# EAGLE board prog_adapter (EAGLE 6.4)
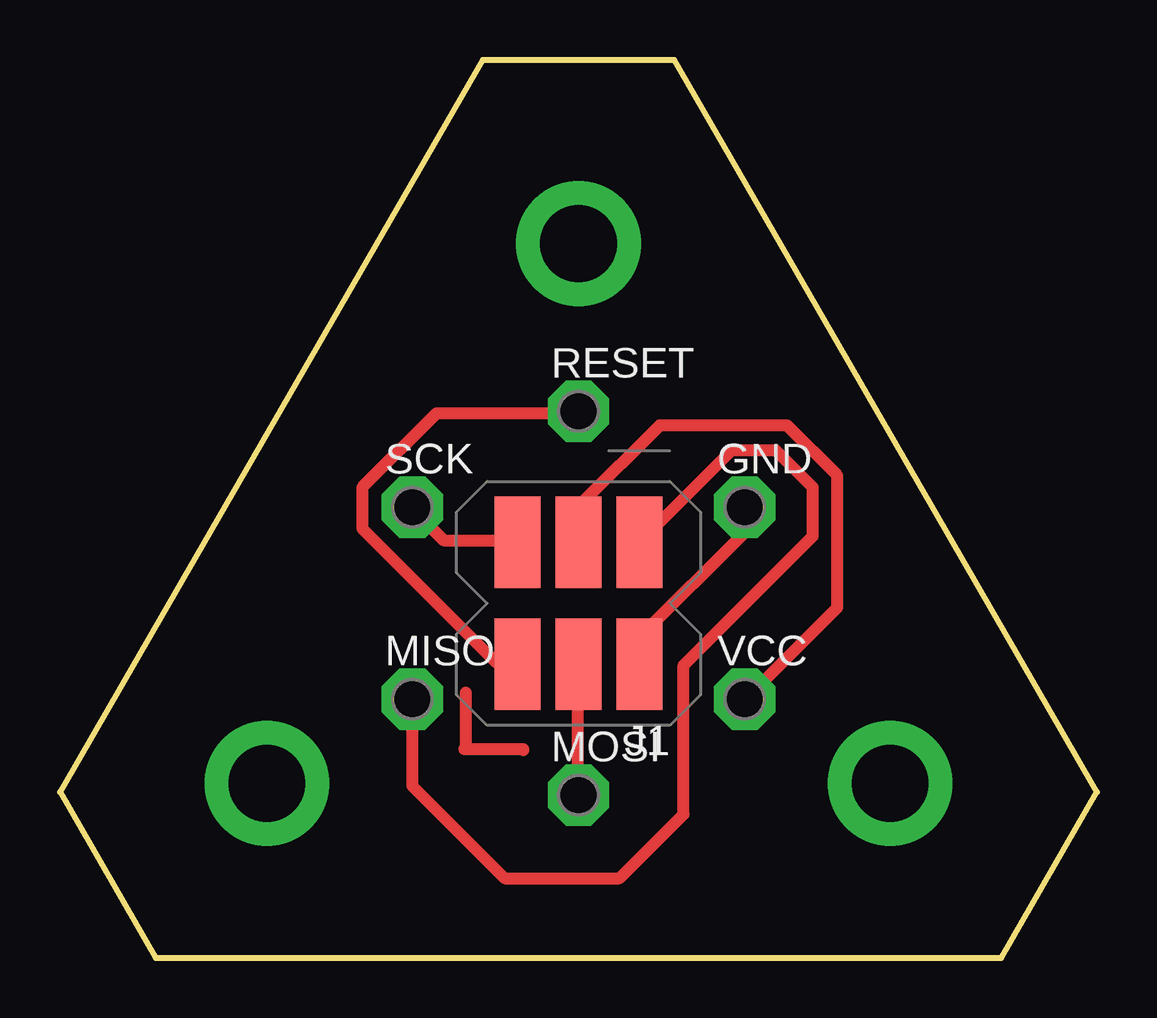
[diagram p0: board, top side]

Size 43.23 x 37.43 mm. Coordinates in mm from the lower left corner, seen from the top.
Outline: 25.61,37.44 17.62,37.44 0,6.92 3.99,0 39.23,0 43.23,6.92 25.61,37.44
Copper layers (1*16): Top 0.035mm / dielectric 1.5mm / Bottom 0.035mm
Design rules "default *": minimum track width 19mil, minimum drill 24mil, track to track 20mil, track to pad 20mil, pad to pad 20mil, via to via 20mil, smd to smd 20mil, copper to edge 40mil, drill to drill 25mil, minimum pad ring 10mil, minimum via ring 8mil, stop-mask expansion 4mil, vias tented up to drill 0mil, thermal gap 10mil

## Footprints (pad centres in the part's own frame; a part is rotated, then mirrored left to right if it is on the bottom)
P1-17 = drill 1.702 pad 2.54 octagon: TP 0,0
2X3_ICSP_SMD = smd 1.905 x 3.81: P$1 -2.54,-2.54; P$2 0,-2.54; P$3 2.54,-2.54; P$4 0,2.54; P$5 2.54,2.54; P$7 -2.54,2.54

## Placement (x,y rotation side)
GND  PTR1PAD1-17  [P1-17]  28.54,18.78 0 top
J1  AVR_SPI_PRG_6  [2X3_ICSP_SMD]  21.61,14.78 180 top
MISO  PTR1PAD1-17  [P1-17]  14.68,10.78 0 top
MOSI  PTR1PAD1-17  [P1-17]  21.61,6.78 0 top
RESET  PTR1PAD1-17  [P1-17]  21.61,22.78 0 top
SCK  PTR1PAD1-17  [P1-17]  14.68,18.78 0 top
VCC  PTR1PAD1-17  [P1-17]  28.54,10.78 0 top

## Library data of the parts
GND MISO MOSI RESET SCK VCC = testpad
J1 = SparkFun

## Nets
N$1: J1.P$1 MISO.TP
N$2: J1.P$3 SCK.TP
N$3: J1.P$5 RESET.TP
N$4: J1.P$2 VCC.TP
N$5: J1.P$4 MOSI.TP
N$6: GND.TP J1.P$7

## Tracks (layer width: path | path; a pad name or v marks a point on that pad's centre or on a via)
N$1
  Top 0.5: MISO.TP 14.68,7.18 18.54,3.33 23.33,3.33 26,6 26,12.2 31.38,17.58 31.38,19.62 29.84,21.16 27.99,21.16 J1.P$1
N$2
  Top 0.508: J1.P$3 19,17.41 16,17.41 14.7,18.71 SCK.TP
N$3
  Top 0.508: J1.P$5 19,12.31 18.2,12.31 12.6,17.91 12.6,19.61 15.7,22.71 21.6,22.71 RESET.TP
N$4
  Top 0.508: J1.P$2 21.7,17.41 21.7,18.91 25,22.21 30.3,22.21 32.4,20.11 32.4,14.61 28.6,10.81 VCC.TP
N$5
  Top 0.508: J1.P$4 21.6,12.21 21.6,6.81 MOSI.TP
N$6
  Top 0.508: J1.P$7 24.2,12.31 24.2,13.41 28.5,17.71 28.5,18.71 GND.TP
N$7  (via drill 3.2 pad 5.2)
  other vias: 21.61,29.78
N$8  (via drill 3.2 pad 5.2)
  other vias: 8.62,7.28
N$9  (via drill 3.2 pad 5.2)
  other vias: 34.6,7.28
N$10
  Top 0.5: 16.91,11.07 16.91,8.8
N$11
  Top 0.5: 16.86,8.71 19.3,8.71 19.3,8.67